# EAGLE board IO (EAGLE 6.2)
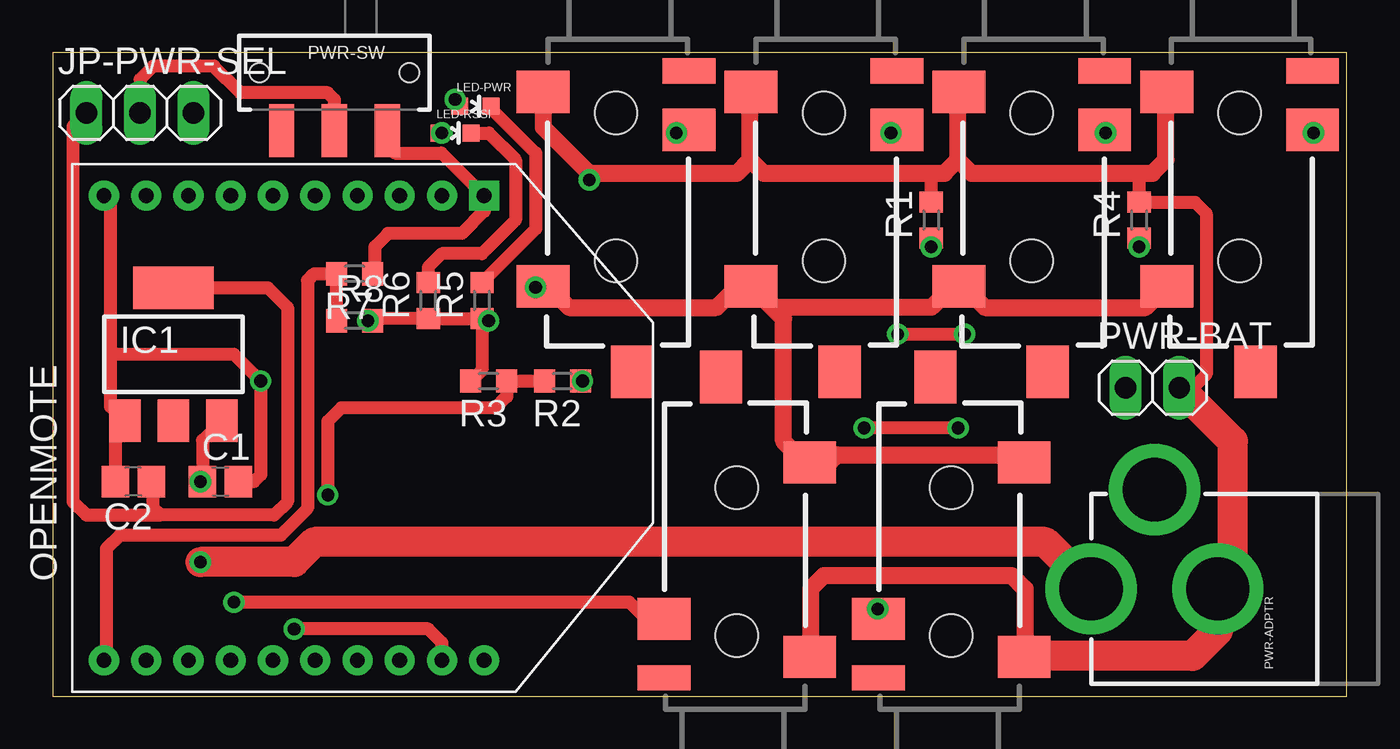
[diagram p0: board, top side]
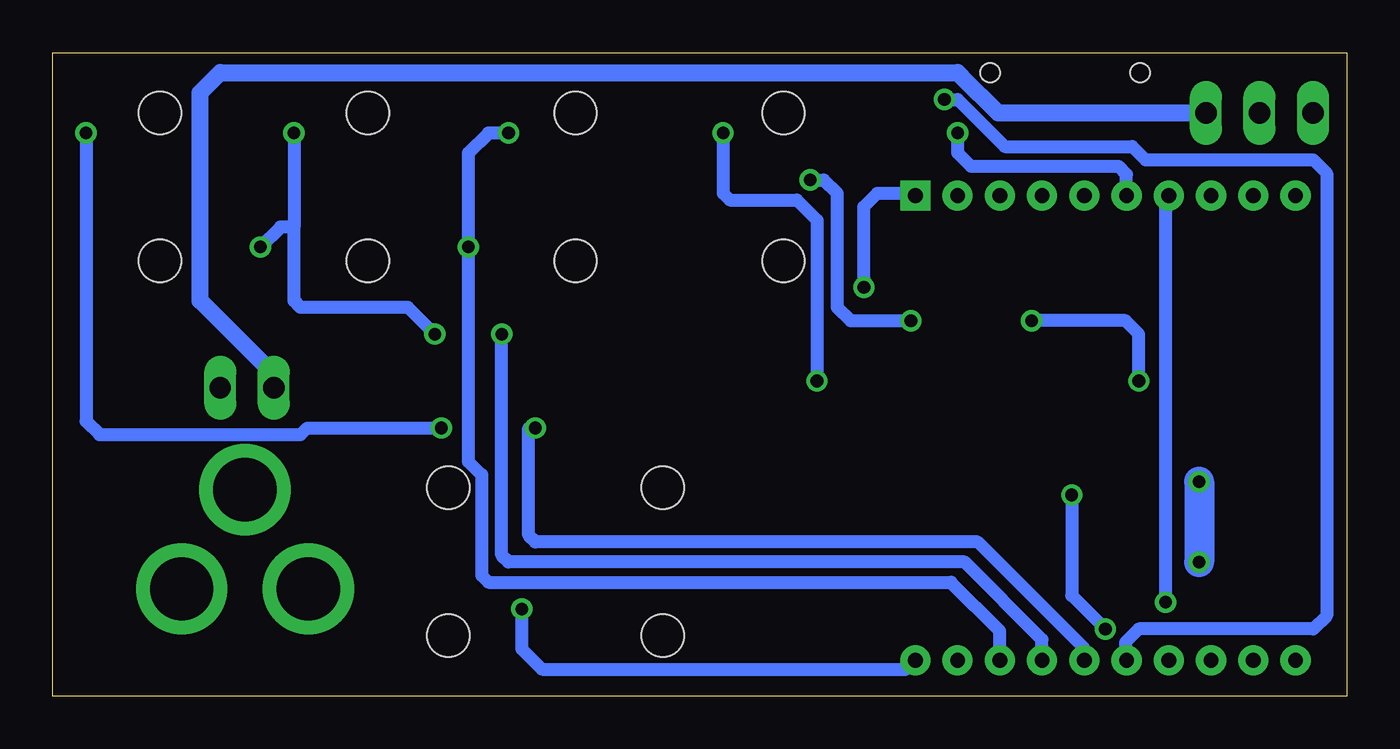
[diagram p1: board, bottom side, seen from below]

Size 61.27 x 30.47 mm. Coordinates in mm from the lower left corner, seen from the top.
Outline: 0,0 61.27,0 61.27,30.47 0,30.47 0,0
Copper layers (1*16): Top 0.035mm / dielectric 1.5mm / Bottom 0.035mm
Design rules: minimum track width 10mil, minimum drill 24mil, track to track 8mil, track to pad 8mil, pad to pad 8mil, via to via 8mil, smd to smd 8mil, copper to edge 40mil, drill to drill 8mil, minimum pad ring 10mil, minimum via ring 8mil, stop-mask expansion 4mil, vias tented up to drill 0mil, thermal gap 10mil

## Footprints (pad centres in the part's own frame; a part is rotated, then mirrored left to right if it is on the bottom)
C0805 = smd 1.3 x 1.5: 1 -0.85,0; 2 0.85,0
SOT223 = smd 1.5 x 2: 1 -2.3,-3.15; 2 0,-3.15; 3 2.3,-3.15 | smd 3.8 x 2: 4 0,3.15
1X03 = drill 1.016 long: 1 -2.54,0; 2 0,0; 3 2.54,0
LED-0603 = smd 0.8 x 0.8: A 0,-0.75; C 0,0.75
XBEE = drill 0.7 pad 1.422 square: 1 -11,5.5 | drill 0.7 pad 1.422: 2 -11,3.5; 3 -11,1.5; 4 -11,-0.5; 5 -11,-2.5; 6 -11,-4.5; 7 -11,-6.5; 8 -11,-8.5; 9 -11,-10.5; 10 -11,-12.5; 11 11,-12.5; 12 11,-10.5; 13 11,-8.5; 14 11,-6.5; 15 11,-4.5; 16 11,-2.5; 17 11,-0.5; 18 11,1.5; 19 11,3.5; 20 11,5.5
POWER_JACK_PTH = drill 2.997 pad 4.318: GND 0,7.7; GNDBREAK 4.7,10.7; PWR 0,13.7
1X02 = drill 1.016 long: 1 -1.27,0; 2 1.27,0
SWITCH-SPDT-SMD = smd 1.2 x 2.5: 1 -2.5,-2.75; 2 0,-2.75; 3 2.5,-2.75 | hole 0.9: -3.55,0; 3.55,0
R0603 = smd 1 x 1.1: 1 -0.85,0; 2 0.85,0
AUDIO-JACK-3.5MM-SMD = smd 2 x 2.5: RING 4.3,3.45; SLEEVE 2.5,-3.45; TIP 11.7,-3.45 | smd 1.2 x 2.5: RSH 1.5,3.45 | smd 2.5 x 2: TSH 15.75,0.75 | hole 2: 3.5,0; 10.5,0

## Placement (x,y rotation side)
C1  1uF  [C0805]  7.94,10.16 0 top
C2  1uF  [C0805]  3.81,10.16 180 top
IC1  LD117AS33TR  [SOT223]  5.71,16.19 0 top
JP-PWR-SEL  [1X03]  4.13,27.62 0 top
LED-PWR  [LED-0603]  20,27.94 270 top
LED-RSSI  [LED-0603]  19.05,26.67 270 top
OPENMOTE  XBEE  [XBEE]  14.92,12.7 270 top
PWR-ADPTR  POWER_JACKPTH  [POWER_JACK_PTH]  62.87,5.08 90 top
PWR-BAT  [1X02]  52.07,14.61 0 top
PWR-SW  [SWITCH-SPDT-SMD]  13.34,29.53 0 top
R1  120R  [R0603]  41.59,22.54 90 top
R2  2K  [R0603]  24.13,14.92 180 top
R3  1K  [R0603]  20.64,14.92 180 top
R4  60R  [R0603]  51.44,22.54 90 top
R5  330R  [R0603]  20.32,18.73 90 top
R6  330R  [R0603]  17.78,18.73 90 top
R7  3.3K  [R0603]  14.29,20 180 top
R8  1K  [R0603]  14.29,17.78 0 top
U1  [AUDIO-JACK-3.5MM-SMD]  42.55,-0.64 90 top
U2  [AUDIO-JACK-3.5MM-SMD]  56.2,31.11 270 top
U3  [AUDIO-JACK-3.5MM-SMD]  36.51,31.11 270 top
U4  [AUDIO-JACK-3.5MM-SMD]  26.67,31.11 270 top
U5  [AUDIO-JACK-3.5MM-SMD]  46.35,31.11 270 top
U6  [AUDIO-JACK-3.5MM-SMD]  32.38,-0.64 90 top

## Library data of the parts
C1 C2 R1-R8 = resistor
IC1 = v-reg
JP-PWR-SEL PWR-BAT = pinhead
LED-PWR LED-RSSI = SparkFun-LED
OPENMOTE = adafruit
PWR-ADPTR U1-U6 = SparkFun-Connectors
PWR-SW = SparkFun-Electromechanical

## Nets
0-10V: R2.1 U4.RING
3.3V: OPENMOTE.1 PWR-SW.3 R7.1 U1.TIP U2.TIP U3.TIP U4.TIP U5.TIP U6.TIP
5V: C1.1 IC1.3 PWR-ADPTR.PWR
AN-IN-0-10V-1: OPENMOTE.19 R2.2 R3.1
AN-IN-0-50MA-1: OPENMOTE.17 R4.1 U5.RING
AN-IN-3.3V-1: OPENMOTE.20 U1.RING
AN-IN-4-20MA-1: OPENMOTE.18 R1.1 U3.RING
AN-IN-VCC: OPENMOTE.11 R7.2 R8.1
ASC: LED-PWR.A OPENMOTE.15
DIG-IO-1: OPENMOTE.16 U2.RING
GND: C1.2 C2.2 IC1.1 OPENMOTE.10 PWR-ADPTR.GND PWR-BAT.2 R1.2 R3.2 R4.2 R5.1 R6.1 R8.2 U1.SLEEVE U2.SLEEVE U3.SLEEVE U4.SLEEVE U5.SLEEVE U6.SLEEVE
N$1: LED-PWR.C R5.2
N$2: LED-RSSI.C R6.2
PWM-1: OPENMOTE.7 U6.RING
RSSI: LED-RSSI.A OPENMOTE.6
V-ADPTR: C2.1 IC1.4 JP-PWR-SEL.1
V-BAT: JP-PWR-SEL.3 PWR-BAT.1
V-SEL: JP-PWR-SEL.2 PWR-SW.2

## Tracks (layer width: path | path; a pad name or v marks a point on that pad's centre or on a via)
0-10V  (via drill 0.6)
  Top 0.61: R2.1 v25.08,14.92 | U4.RING 29.67,26.82 v29.53,26.67
  Bottom 0.61: v29.53,26.67 29.53,23.81 29.21,23.5 26.04,23.5 25.08,22.54 v25.08,14.92
3.3V  (via drill 0.6)
  Top 0.61: PWR-SW.3 15.84,26.07 16.19,25.72 18.41,25.72 OPENMOTE.1 20.42,22.96 19.37,21.91 15.88,21.91 15.24,21.27 15.24,20.11 R7.1 | U4.TIP 22.91,19.41 v22.86,19.37 | 32.38,19.37 33.02,19.37 33.34,19.05 33.34,19.14 U3.TIP
  Top 0.813: 34.06,18.41 34.61,17.87 34.61,12.06 35.61,11.06 U6.TIP 36.78,11.06 37.15,11.43 45.63,11.43 U1.TIP | 34.06,18.41 U3.TIP | U4.TIP 23.45,19.41 24.45,18.41 31.43,18.41 32.38,19.37 | 34.06,18.41 41.59,18.41 42.59,19.41 U5.TIP 43.13,19.41 44.13,18.41 51.75,18.41 U2.TIP
  Bottom 0.61: v22.86,19.37 22.86,23.18 22.23,23.81 20.54,23.81 OPENMOTE.1
5V  (via drill 0.6)
  Top 0.61: IC1.3 7.09,12.12 C1.1 v6.99,10.16
  Top 1.422: PWR-ADPTR.PWR 49.16,5.13 46.99,7.3 12.38,7.3 11.43,6.35 v6.99,6.35
  Bottom 1.422: v6.99,10.16 v6.99,6.35
AN-IN-0-10V-1  (via drill 0.6)
  Top 0.61: R2.2 R3.1 21.49,14.19 20.95,13.65 13.65,13.65 13.02,13.02 v13.02,9.53 | OPENMOTE.19 18.42,2.53 17.78,3.17 v11.43,3.17
  Bottom 0.61: v13.02,9.53 13.02,4.76 v11.43,3.17
AN-IN-0-50MA-1  (via drill 0.6)
  Top 0.61: U5.RING 49.8,26.71 v49.85,26.67 | R4.1 v51.44,21.27 | v40.01,17.14 v43.18,17.14
  Bottom 0.61: v49.85,26.67 49.85,22.23 | 49.85,22.23 50.48,22.23 v51.44,21.27 | OPENMOTE.17 14.42,2.67 18.1,6.35 39.69,6.35 40.01,6.67 v40.01,17.14 | 49.85,22.23 49.85,18.73 49.53,18.41 44.45,18.41 v43.18,17.14
AN-IN-3.3V-1  (via drill 0.6)
  Top 0.61: v39.05,4.13 39.05,3.71 U1.RING
  Bottom 0.61: v39.05,4.13 39.05,2.22 38.1,1.27 20.85,1.27 OPENMOTE.20
AN-IN-4-20MA-1  (via drill 0.6)
  Top 0.61: v41.59,21.27 R1.1 | v39.69,26.67 39.82,26.67 U3.RING
  Bottom 0.61: OPENMOTE.18 16.42,3.09 18.73,5.4 40.64,5.4 40.96,5.71 40.96,10.48 41.59,11.11 v41.59,21.27 41.59,25.72 40.64,26.67 v39.69,26.67
AN-IN-VCC
  Top 0.61: OPENMOTE.11 2.54,1.82 2.54,6.99 3.17,7.62 10.79,7.62 12.06,8.89 12.06,19.68 12.38,20 R7.2 R8.1
ASC  (via drill 0.6)
  Top 0.61: LED-PWR.A 19.25,28.05 v19.05,28.26
  Bottom 0.61: v19.05,28.26 18.41,28.26 16.19,26.04 10.16,26.04 9.53,25.4 1.59,25.4 0.95,24.77 0.95,3.81 1.59,3.17 9.84,3.17 10.48,2.54 10.48,1.75 OPENMOTE.15
DIG-IO-1  (via drill 0.6)
  Top 0.61: U2.RING 59.65,26.71 v59.69,26.67 | v42.86,12.7 v38.42,12.7
  Bottom 0.61: OPENMOTE.16 12.42,2.26 17.46,7.3 38.42,7.3 38.73,7.62 38.73,12.7 v38.42,12.7 | v59.69,26.67 59.69,13.02 59.05,12.38 49.53,12.38 49.21,12.7 v42.86,12.7
GND  (via drill 0.6)
  Top 0.61: C2.2 2.96,12.59 IC1.1 2.74,13.72 2.74,16.19 | C1.2 9.53,10.16 9.84,10.48 v9.84,14.92 8.57,16.19 2.74,16.19 | 2.74,16.19 2.74,23.38 OPENMOTE.10 | R1.2 41.59,24.77 | 51.44,24.77 R4.2 54.08,23.39 54.61,22.86 54.61,15.24 53.98,14.61 PWR-BAT.2 | R5.1 R6.1 15.24,17.88 R8.2 v14.92,17.78 | R5.1 20.32,15.46 R3.2 | 25.4,24.77 v25.4,24.45 | v20.64,17.78 20.42,17.78 R5.1
  Top 0.813: 33.02,25.4 32.38,24.77 25.4,24.77 23.22,26.95 U4.SLEEVE | 33.02,25.4 33.02,28.57 U3.SLEEVE | 33.02,25.4 33.66,24.77 41.59,24.77 42.23,24.77 42.86,25.4 | 42.86,25.4 42.86,28.57 U5.SLEEVE | 42.86,25.4 43.5,24.77 51.44,24.77 52.07,24.77 52.7,25.4 52.7,28.57 U2.SLEEVE | U6.SLEEVE 35.88,1.91 35.88,5.08 36.51,5.71 45.4,5.71 46.04,5.08 46.04,1.91 U1.SLEEVE
  Top 1.422: U1.SLEEVE 46.03,1.91 53.98,1.91 55.16,3.1 PWR-ADPTR.GND 55.24,5.08 55.88,5.71 55.88,12.06 PWR-BAT.2
  Bottom 0.61: v25.4,24.45 24.77,24.45 24.13,23.81 24.13,18.41 23.5,17.78 v20.64,17.78 | v9.84,14.92 9.84,17.14 10.48,17.78 v14.92,17.78
N$1
  Top 0.61: 20.42,19.68 R5.2 22.86,22.12 22.86,25.72 20.75,27.82 LED-PWR.C
N$2
  Top 0.61: LED-RSSI.C 20.64,26.67 21.91,25.4 21.91,22.54 20.32,20.95 18.41,20.95 17.78,20.32 R6.2
PWM-1  (via drill 0.6)
  Top 0.61: U6.RING 28.09,3.67 27.3,4.45 v8.57,4.45
  Bottom 0.61: v8.57,4.45 8.57,23.55 OPENMOTE.7
RSSI  (via drill 0.6)
  Top 0.61: LED-RSSI.A v18.41,26.67
  Bottom 0.61: OPENMOTE.6 10.42,24.71 10.79,25.08 17.78,25.08 18.41,25.72 v18.41,26.67
V-ADPTR
  Top 0.61: IC1.4 10.19,19.34 11.11,18.41 11.11,9.21 10.48,8.57 5.08,8.57 | 5.08,8.57 4.76,8.89 4.76,10.06 C2.1 | JP-PWR-SEL.1 0.95,26.99 0.95,9.21 1.59,8.57 5.08,8.57
V-BAT
  Bottom 0.813: PWR-BAT.1 50.8,15.56 51.12,15.56 54.29,18.73 54.29,28.57 53.34,29.53 18.41,29.53 18.26,29.37 16.51,27.62 JP-PWR-SEL.3
V-SEL
  Top 0.61: PWR-SW.2 13.34,28.26 13.02,28.57 8.89,28.57 7.62,29.84 4.76,29.84 4.13,29.21 JP-PWR-SEL.2